# Altium PCB PCB_2.PcbDoc
Units mm, origin at the board's own origin, x right, y up, seen from the top; angles counter-clockwise.
Board outline 97.5 x 97.5 mm, 2 copper layers (Top Layer, Bottom Layer); 59 components, 71 nets, 255 pads, 322 vias.
Unrouted connection lines stored in the file: 1.
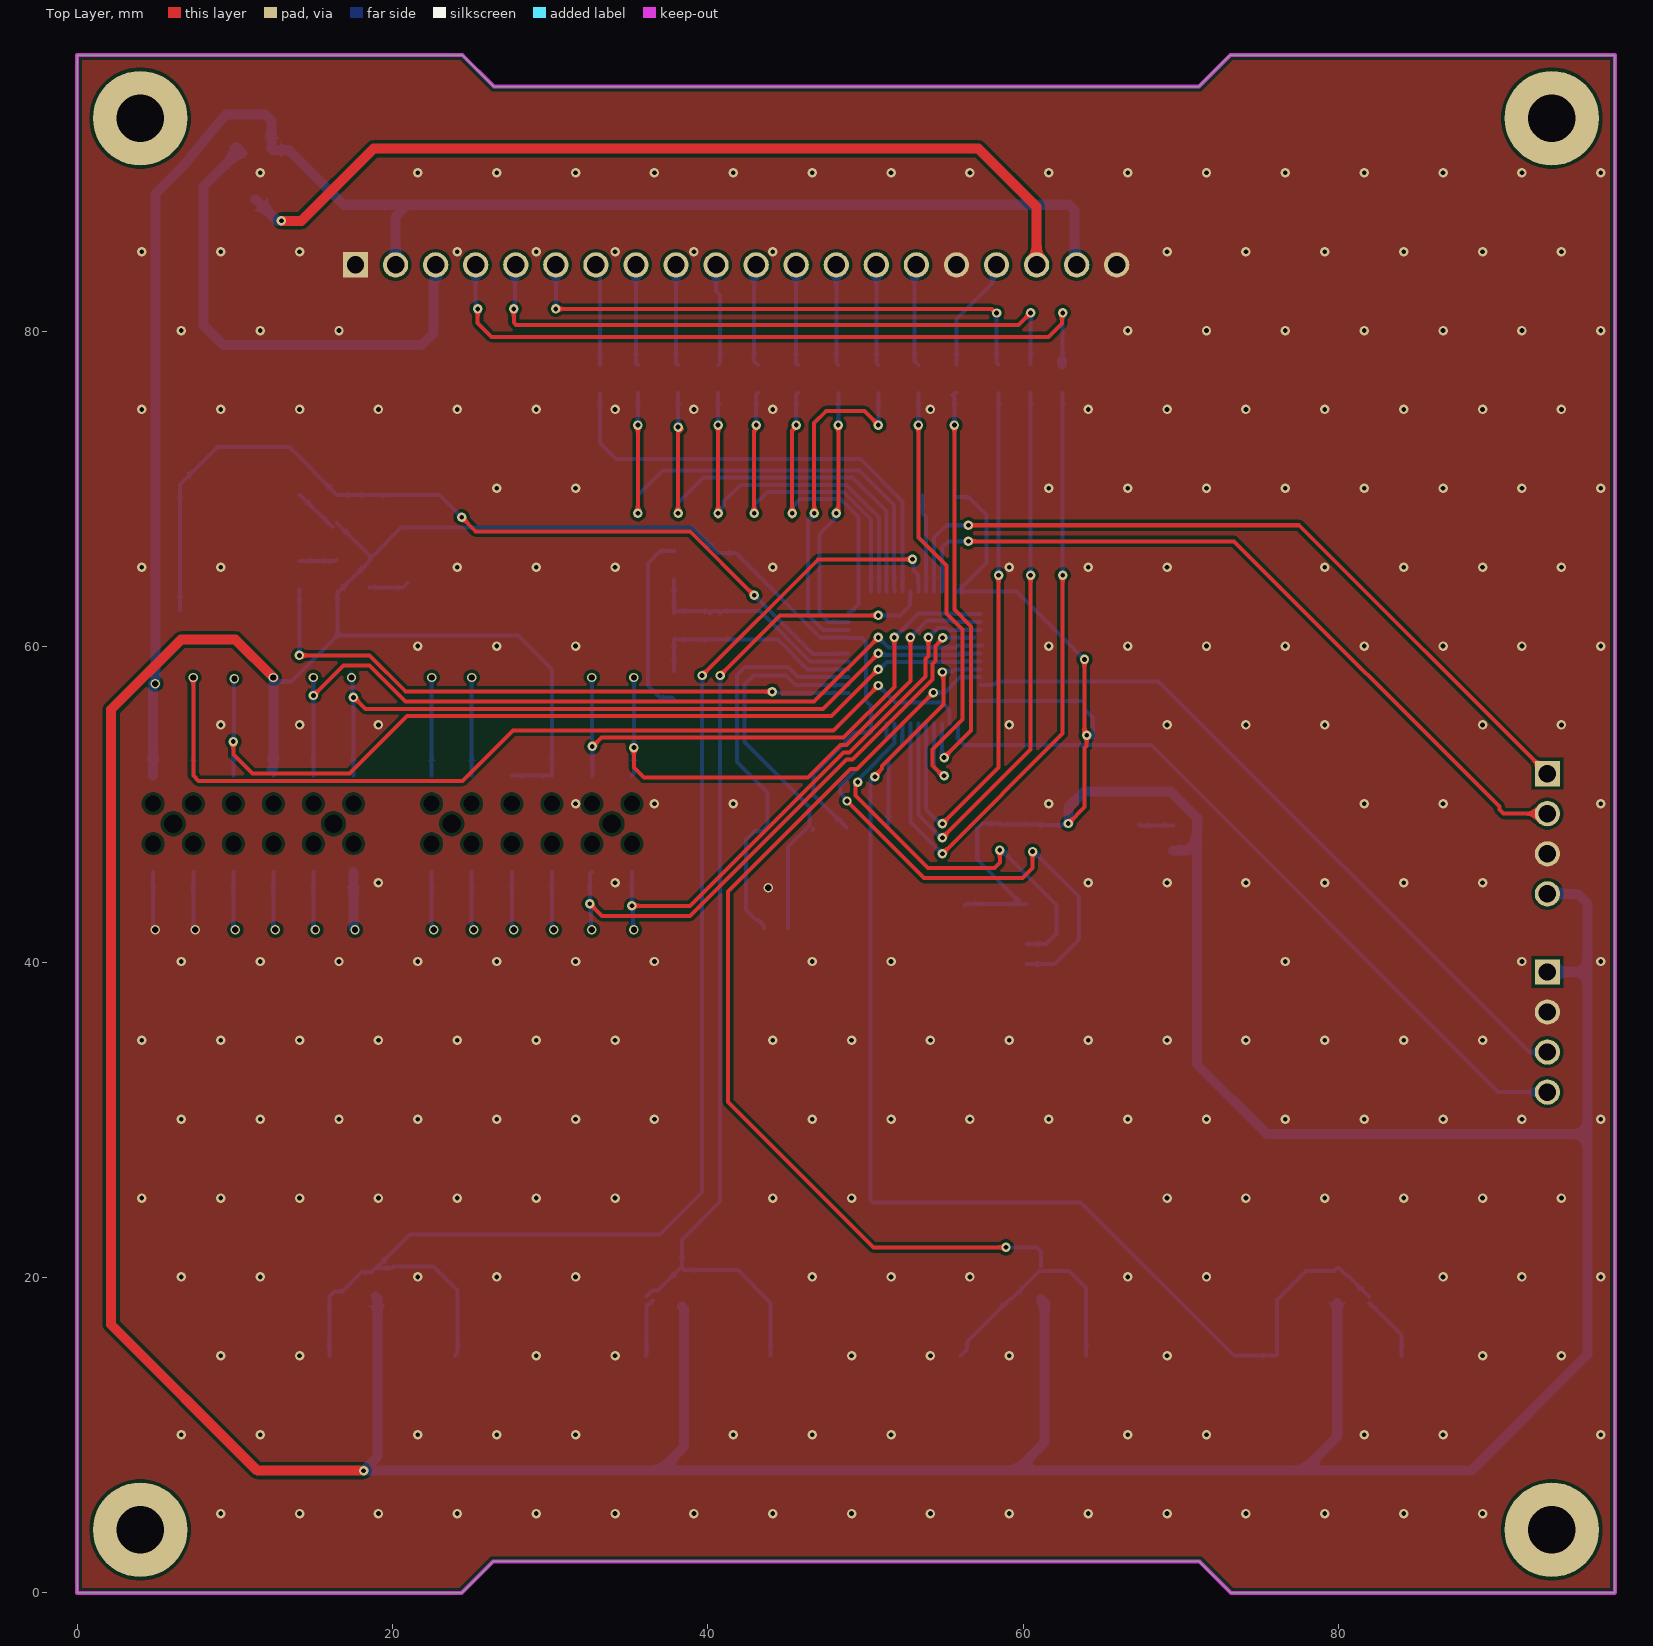
[diagram p0: Top Layer view]
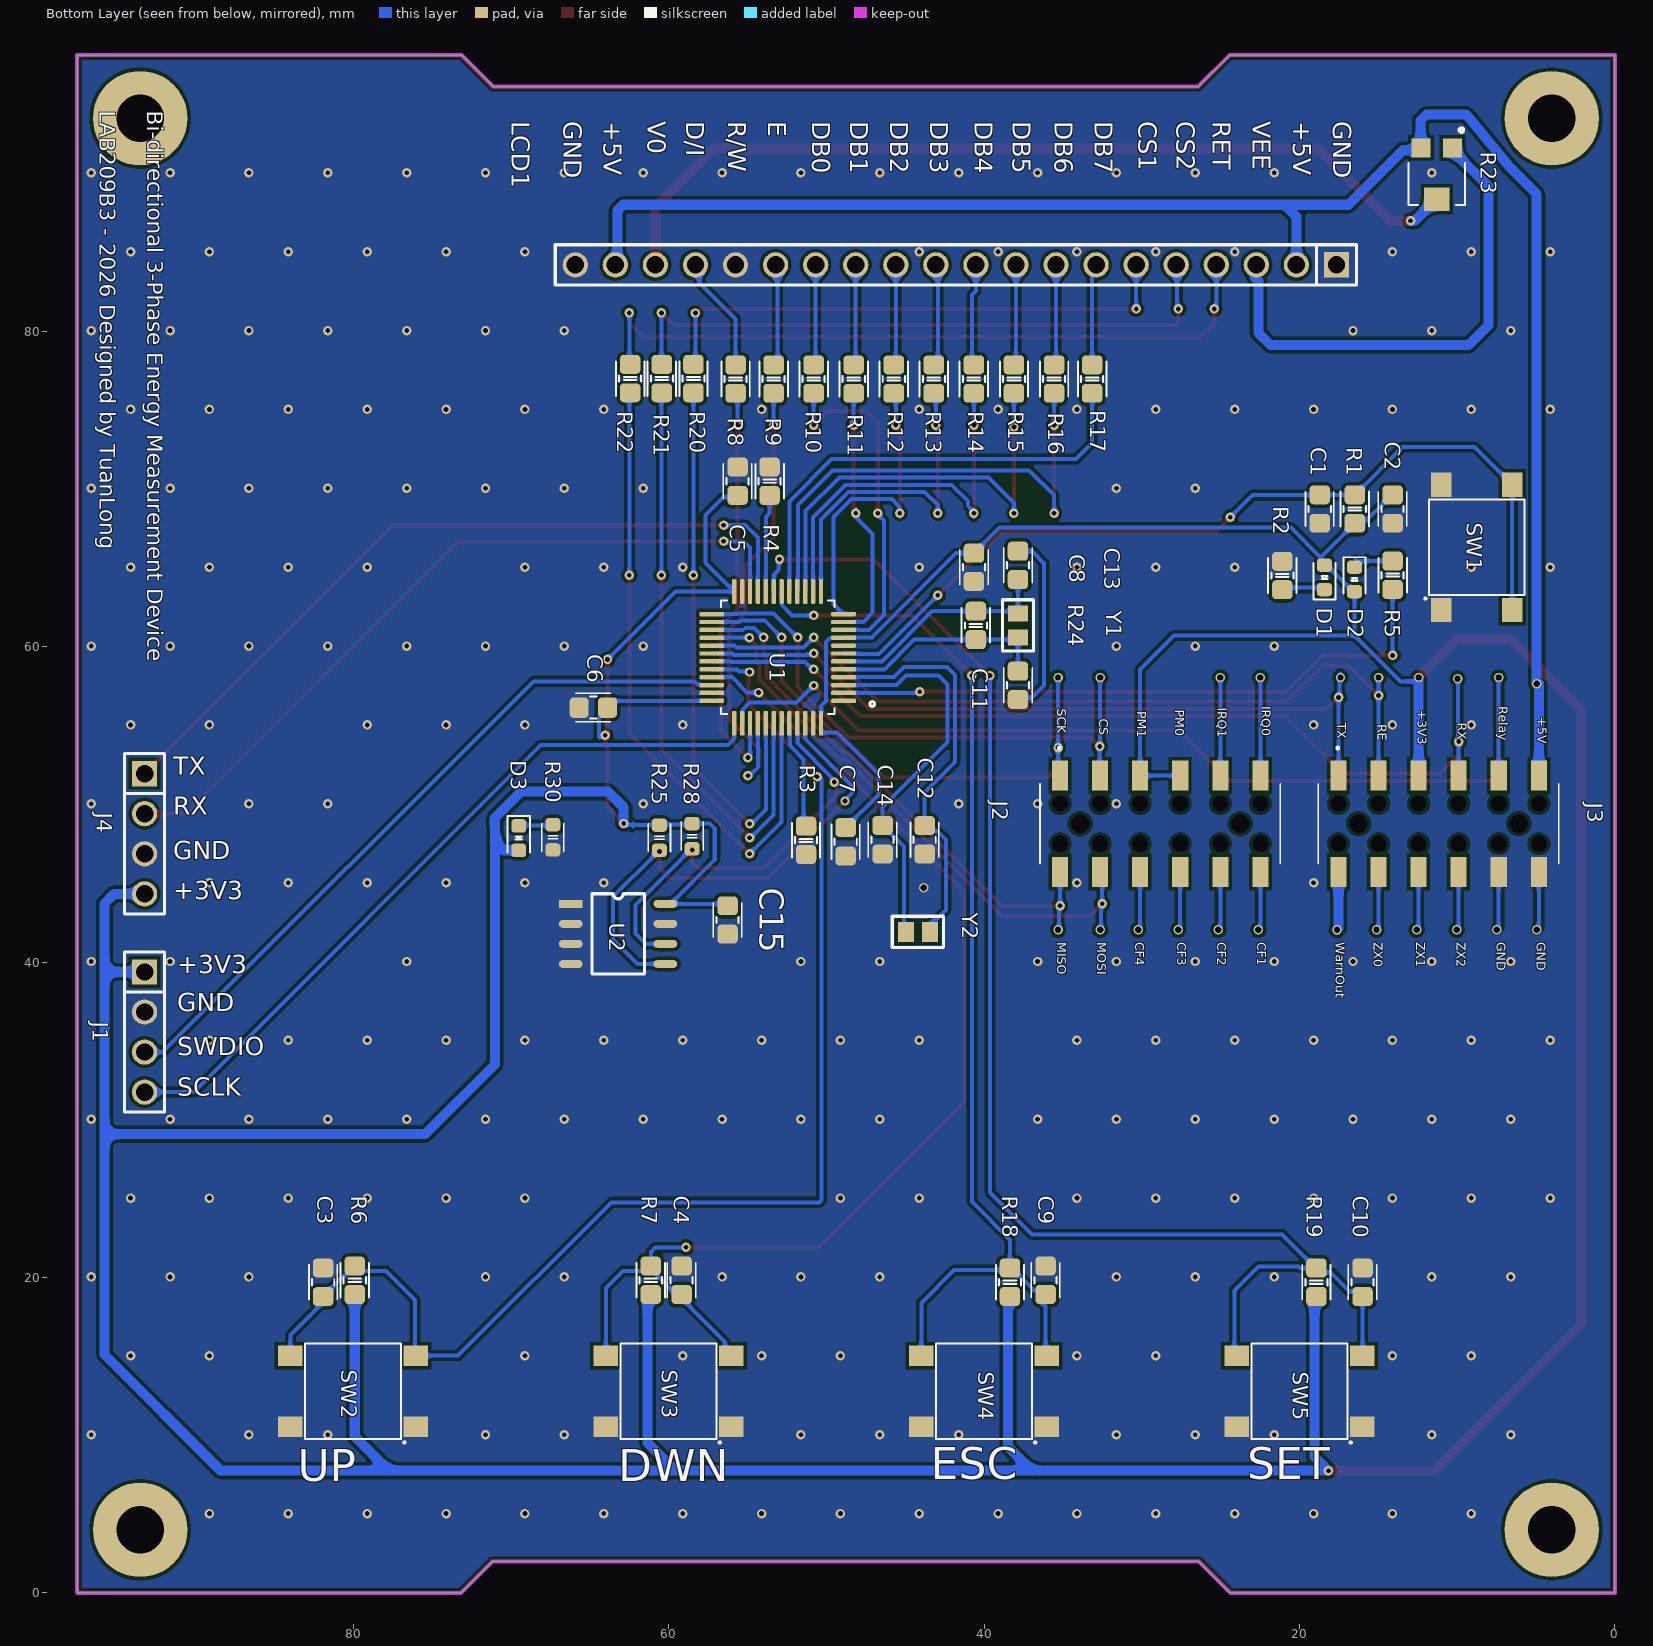
[diagram p1: Bottom Layer view, seen from below]
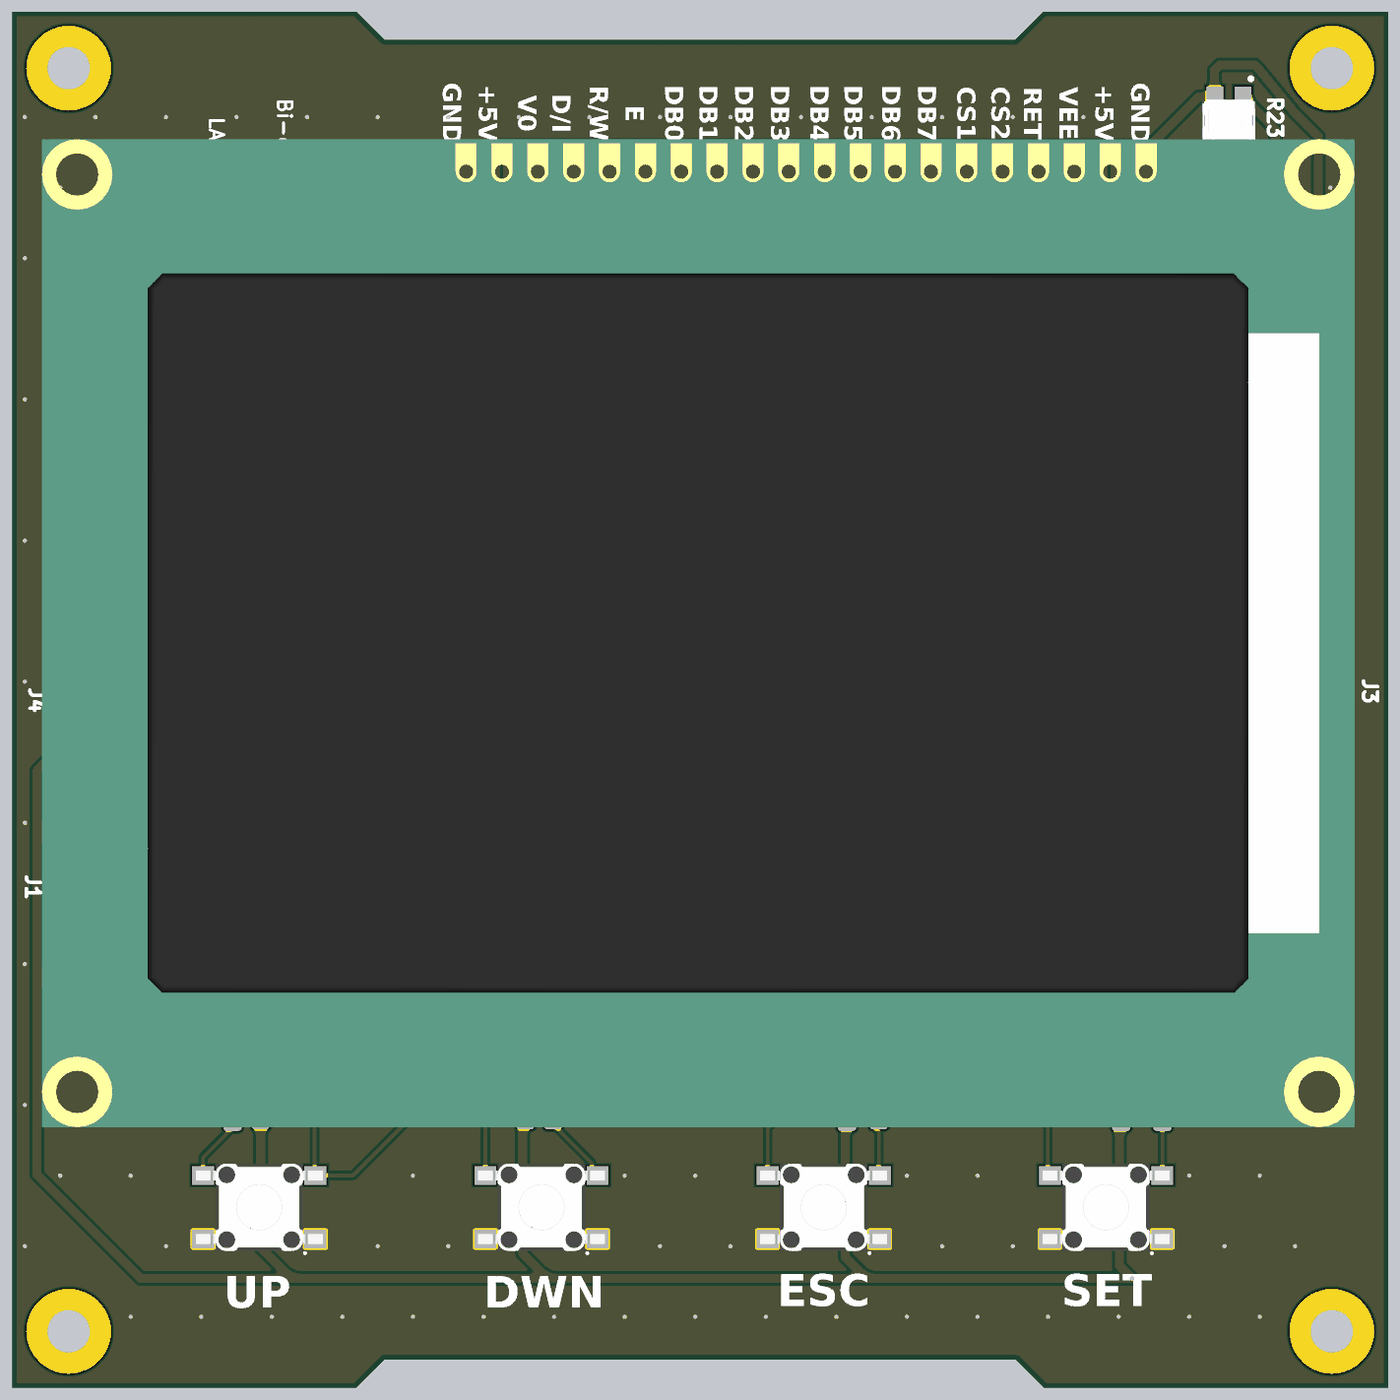
[diagram p2: 3D render of the assembled board from below, using the file's embedded part models]

## Layer stack, top to bottom
Top Solder: solder mask 0.0102, Solder Resist, Dk 3.5
Top Layer: signal copper 0.0356
Dielectric 1: dielectric 0.32, FR-4, Dk 4.8
Bottom Layer: signal copper 0.0356
Bottom Solder: solder mask 0.0102, Solder Resist, Dk 3.5

## Board outline
0,0 0,97.5 24.42,97.5 26.42,95.5 71.116,95.5 73.116,97.5 97.5,97.5 97.5,0.036 97.464,0 73.152,0 71.152,2 26.384,2 24.384,0

## Design rules (kind name [scope] priority, off if disabled: settings)
Clearance [All] p1: gap=0.203 ignorepadtopadclearanceinfootprint=TRUE
PlaneClearance [All] p1: clearance=0.254
PlaneConnect [All] p1: planeconnectstyle=Direct reliefexpansion=0.508 reliefentries=4 reliefconductorwidth=0.254 reliefairgap=0.254
PolygonConnect [All] p1: connectstyle=Direct reliefconductorwidth=0.254 reliefentries=4 polygonreliefangle="90 Angle" airgapwidth=0.254
RoutingVias [All] p1: holewidth=0.3 width=0.6 viastyle="Through Hole" minholewidth=0.3 minwidth=0.6 maxholewidth=0.711 maxwidth=1.2
SolderMaskExpansion [All] p1: expansion=0.102 istentingtop=FALSE
SupplyNets "Schematic Supply Nets_2" [InNet('VCC5V')] p1: voltage=0.000
SupplyNets "Schematic Supply Nets_1" [InNet('GND')] p2: voltage=0.000
SupplyNets "Schematic Supply Nets" [InNet('VCC3V3')] p3: voltage=0.000
Width [All] p1: maxlimit=0.635 minlimit=0.152 preferedwidth=0.254
28 further rules are at their usual default settings.

## Classes and differential pairs
component class Sheet1: C1 C2 C4 C5 C7 C8 C9 C10 C15 D1 D2 D3 J1 J2 J3 J4 LCD1 R1 R2 R3 R4 R5 R8 R9 R12 R14 R15 R16 R17 R18 R19 R21 R22 R25 SW1 SW2 SW3 SW4 SW5 U1 U2 UP Y1 Y2

## Components (designator, comment, footprint, x,y, rotation, side; value= is the part's Value field where it differs from the comment)
C1 "100nF" CAP_C_2012X110 18.715,68.718 r90 bottom
C2 "100nF" CAP_C_2012X110 14.097,68.718 r90 bottom
C3 "100nF" CAP_C_2012X110 81.896,19.696 r270 bottom
C4 "100nF" CAP_C_2012X110 59.173,19.823 r270 bottom
C5 "100nF" CAP_C_2012X110 55.626,70.485 r270 bottom
C6 "100nF" CAP_C_2012X110 64.77,56.134 r180 bottom
C7 "100nF" CAP_C_2012X110 48.768,47.625 r90 bottom
C8 "100nF" CAP_C_2012X110 40.64,65.024 r90 bottom
C9 "100nF" CAP_C_2012X110 36.098,19.823 r270 bottom
C10 "100nF" CAP_C_2012X110 16.002,19.696 r270 bottom
C11 "100nF" CAP_C_2012X110 37.846,57.542 r90 bottom
C12 "100nF" CAP_C_2012X110 43.759,47.752 r90 bottom
C13 "100nF" CAP_C_2012X110 37.846,65.151 r270 bottom
C14 "100nF" CAP_C_2012X110 46.426,47.752 r90 bottom
C15 "100nF" CAP_C_2012X110 56.261,42.668 r90 bottom
D1 "_LED_RED" LED_0603 18.415,64.389 r90 bottom
D2 "_LED_BLUE" LED_0603 16.51,64.262 r270 bottom
D3 "_LED_RED" LED_0603 69.498,47.855 r270 bottom
J1 "HEADER 4x1" Header_254P_4x1 93.218,35.56 r270 bottom
J2 "SSM-106-S-DV" SSM-106-XXX-DV-BE 28.829,48.768 r0 bottom
J3 "SSM-106-S-DV" SSM-106-XXX-DV-BE 11.176,48.768 r0 bottom
J4 "HEADER 4x1" Header_254P_4x1 93.218,48.133 r270 bottom
LCD1 "DISPLAY_LCDGRAP" LCD_GRAP_20PIN 48.895,53.467 r270 bottom locked
R1 "1k" RES_C_2012X65 16.494,68.718 r270 bottom
R2 "1k" RES_C_2012X65 21.082,64.505 r90 bottom
R3 "1k" RES_C_2012X65 51.285,47.713 r270 bottom
R4 "1k" RES_C_2012X65 53.594,70.485 r90 bottom
R5 "1k" RES_C_2012X65 14.097,64.527 r270 bottom
R6 "1k" RES_C_2012X65 79.896,19.823 r270 bottom
R7 "1k" RES_C_2012X65 61.128,19.823 r270 bottom
R8 "1k" RES_C_2012X65 55.753,76.962 r270 bottom
R9 "1k" RES_C_2012X65 53.34,76.962 r270 bottom
R10 "1k" RES_C_2012X65 50.8,76.962 r270 bottom
R11 "1k" RES_C_2012X65 48.26,76.962 r270 bottom
R12 "1k" RES_C_2012X65 45.72,76.962 r270 bottom
R13 "1k" RES_C_2012X65 43.18,76.962 r270 bottom
R14 "1k" RES_C_2012X65 40.64,76.962 r270 bottom
R15 "1k" RES_C_2012X65 38.1,76.962 r270 bottom
R16 "1k" RES_C_2012X65 35.56,76.962 r270 bottom
R17 "1k" RES_C_2012X65 33.147,76.962 r270 bottom
R18 "1k" RES_C_2012X65 38.354,19.696 r270 bottom
R19 "1k" RES_C_2012X65 18.923,19.696 r270 bottom
R20 "1k" RES_C_2012X65 58.42,76.989 r270 bottom
R21 "1k" RES_C_2012X65 60.428,76.989 r270 bottom
R22 "1k" RES_C_2012X65 62.436,76.989 r270 bottom
R23 "20K" TRIM_TC33X-2-103E 11.29,89.8 r270 bottom
R24 "1k" RES_C_2012X65 40.513,61.341 r270 bottom
R25 "4.7k" RES_C_1608X60 60.579,47.879 r90 bottom
R28 "4.7k" RES_C_1608X60 58.503,47.975 r90 bottom
R30 "330Ohms" RES_C_1608X60 67.339,47.906 r270 bottom
SW1 "SW2" SW2-SMD 8.763,66.294 r90 bottom value="SW chip 2 pin"
SW2 "SW2" SW2-SMD 80,12.791 r0 bottom value="SW chip 2 pin"
SW3 "SW2" SW2-SMD 60,12.791 r0 bottom value="SW chip 2 pin"
SW4 "SW2" SW2-SMD 40,12.791 r0 bottom value="SW chip 2 pin"
SW5 "SW2" SW2-SMD 20,12.791 r0 bottom value="SW chip 2 pin"
U1 "STM32F103C8T6" QFP50P900X900X160-48N 53.086,59.309 r0 bottom
U2 "CAT24C32WI-GT3 IC EEPROM 32Kbit 8-SOIC" SOP8 66.698,43.688 r180 bottom
Y1 "Crystal 2 Pins" CRYSTAL_NX2012SA 37.846,61.341 r270 bottom value=32.768kHz
Y2 "Crystal 2 Pins" CRYSTAL_NX2012SA 44.196,41.91 r180 bottom value=32.768kHz

## Footprints (in the part's own frame and the unit in brackets; to place one, negate y for a bottom-side part, rotate by r counter-clockwise, add the part's x,y. Pads: shape width x height; smd on the part's side, far side on the other; paste and mask are expansions set on the pad)
CAP_C_2012X110 [mm] "Chip Capacitor, 2-Leads, Body 2.00x1.25mm, IPC High Density"
  rrect41% 1.2x1.3 smd: 1(-0.9,0) 2(0.9,0)
  silkscreen extent -1.1,-0.9 1.1,0.9, body extent -1.1,-0.72 1.1,0.72, height 1.1
CRYSTAL_NX2012SA [mil] "Crystal NDK NX2012SA"
  rect 40x50 smd paste-1: 1(-30,0) 2(30,0)
  silkscreen extent -64,-39 64,39, body extent -40,-20 40,20, height 21
Header_254P_4x1 [mm]
  rect 1.6x1.6 hole 1.1: 1(-3.81,0)
  round 1.6 hole 1.1: 2(-1.27,0) 3(1.27,0) 4(3.81,0)
  silkscreen extent -5.08,-1.27 5.08,1.27
LCD_GRAP_20PIN [mm]
  rect 1.6x1.6 hole 1.1: 1(-30.734,31.242)
  round 1.6 hole 1.1: 2(-30.734,28.702) 3(-30.734,26.162) 4(-30.734,23.622) 5(-30.734,21.082) 6(-30.734,18.542) 7(-30.734,16.002) 8(-30.734,13.462) 9(-30.734,10.922) 10(-30.734,8.382) 11(-30.734,5.842) 12(-30.734,3.302) 13(-30.734,0.762) 14(-30.734,-1.778) 15(-30.734,-4.318) 16(-30.734,-6.858) 17(-30.734,-9.398) 18(-30.734,-11.938) 19(-30.734,-14.478) 20(-30.734,-17.018)
  silkscreen extent -32,-18.29 -29.46,32.51, body extent -35,-46.5 35,46.5, height 21.2
LED_0603 [mm]
  rrect50% 0.85x0.95 smd: 1(-0.775,0) 2(0.775,0)
  silkscreen extent -1.4,-0.7 0.9,0.7, body extent -0.8,-0.4 0.8,0.4, height 0.7
QFP50P900X900X160-48N [mm]
  rrect50% 1.56x0.28 smd: 1(-4.18,2.75) 2(-4.18,2.25) 3(-4.18,1.75) 4(-4.18,1.25) 5(-4.18,0.75) 6(-4.18,0.25) 7(-4.18,-0.25) 8(-4.18,-0.75) 9(-4.18,-1.25) 10(-4.18,-1.75) 11(-4.18,-2.25) 12(-4.18,-2.75) 25(4.18,-2.75) 26(4.18,-2.25) 27(4.18,-1.75) 28(4.18,-1.25) 29(4.18,-0.75) 30(4.18,-0.25) 31(4.18,0.25) 32(4.18,0.75) 33(4.18,1.25) 34(4.18,1.75) 35(4.18,2.25) 36(4.18,2.75)
  rrect50% 0.28x1.56 smd: 13(-2.75,-4.18) 14(-2.25,-4.18) 15(-1.75,-4.18) 16(-1.25,-4.18) 17(-0.75,-4.18) 18(-0.25,-4.18) 19(0.25,-4.18) 20(0.75,-4.18) 21(1.25,-4.18) 22(1.75,-4.18) 23(2.25,-4.18) 24(2.75,-4.18) 37(2.75,4.18) 38(2.25,4.18) 39(1.75,4.18) 40(1.25,4.18) 41(0.75,4.18) 42(0.25,4.18) 43(-0.25,4.18) 44(-0.75,4.18) 45(-1.25,4.18) 46(-1.75,4.18) 47(-2.25,4.18) 48(-2.75,4.18)
  silkscreen extent -6.15,-3.6 3.6,3.6, body extent -4.5,-4.5 4.5,4.5, height 1.6
RES_C_1608X60 [mm] "Chip Resistor, 2-Leads, Body 1.63x0.83mm, IPC High Density"
  rrect50% 0.85x0.95 smd: 1(-0.8,0) 2(0.8,0)
  silkscreen extent -0.9,-0.7 0.9,0.7, body extent -0.87,-0.48 0.87,0.48, height 0.6
RES_C_2012X65 [mm] "Chip Resistor, 2-Leads, Body 2.00x1.25mm, IPC High Density"
  rrect41% 1.2x1.3 smd: 1(-0.9,0) 2(0.9,0)
  silkscreen extent -1.1,-0.9 1.1,0.9, body extent -1.07,-0.7 1.07,0.7, height 0.65
SOP8 [mm]
  rect 1.5x0.5 smd: 1(0.5,0)
  oval 1.5x0.5 smd: 2(0.5,-1.27) 3(0.5,-2.54) 4(0.5,-3.81) 5(6.5,-3.81) 6(6.5,-2.54) 7(6.5,-1.27) 8(6.5,0)
  silkscreen extent 1.84,-4.45 5.17,0.63, body extent 0.43,-4.36 6.43,0.55, height 1.75
SSM-106-XXX-DV-BE [mm]
  rect 1.02x1.905 smd: 1(6.35,-3.047) 2(6.35,3.047) 3(3.81,-3.047) 4(3.81,3.047) 5(1.27,-3.047) 6(1.27,3.047) 7(-1.27,-3.047) 8(-1.27,3.047) 9(-3.81,-3.047) 10(-3.81,3.047) 11(-6.35,-3.047) 12(-6.35,3.047)
  round 0.585 hole 1.17 unplated: 13(5.08,0) 14(-5.08,0)
  round 0.51 hole 1.02 unplated: 13(6.35,-1.27) 14(6.35,1.27) 15(3.81,-1.27) 16(3.81,1.27) 17(1.27,-1.27) 18(1.27,1.27) 19(-1.27,-1.27) 20(-1.27,1.27) 21(-3.81,-1.27) 22(-3.81,1.27) 23(-6.35,-1.27) 24(-6.35,1.27)
  silkscreen extent -7.62,-4.85 7.62,2.54, body extent -7.62,-3.52 7.62,3.52, height 7.5
SW2-SMD [mm] "6*6mm vertical type, SMD, height 5.0mm, black actuator, 160gf, T&R"
  rect 1.55x1.3 smd: 1(-3.975,2.25) 1(3.975,2.25) 2(-3.975,-2.25) 2(3.975,-2.25)
  silkscreen extent -3.29,-3.04 3.04,3.29, body extent -4.5,-3.1 4.5,3.1, height 4.99
TRIM_TC33X-2-103E [mm]
  rect 1.2x1.2 smd: 1(-1.8,1) 3(-1.8,-1)
  rect 1.5x1.6 smd: 2(1.45,0)
  silkscreen extent -3.07,-1.8 1.8,1.8, body extent -1.5,-1.9 1.5,1.9, height 1.1

## Part data
C1 C2 C3 C4 C5 C6 C7 C8 C9 C10 C11 C12 C13 C14 C15: library part _CAP_C_2, "CAP"
J1 J4: library part "Header 4x1"
J2 J3: "Connector", Arrow Part Number=SSM-105-S-DV, Manufacturer_Name=SAMTEC, Mouser Part Number=200-SSM105SDV, Arrow Price/Stock=https://www.arrow.com/en/products/ssm-105-s-dv/samtec, Datasheet Link=https://mm.digikey.com/Volume0/opasdata/d220001/medias/docus/6129/ssm-1xx-xxx-dv-xx-xx-xxx-x-xx-mkt.pdf, Manufacturer_Part_Number=SSM-105-S-DV, Mouser Price/Stock=https://www.mouser.co.uk/ProductDetail/Samtec/SSM-105-S-DV?qs=XtX6y9BSeMiNY1vJI%2FFCQQ%3D%3D
LCD1: "Display 128x64pixel", Manufacturer="Newhaven Display", Manufacturer Part Number=NHD-12864AZ-NSW-BBW-TR, Supplier Part Number=NHD-12864AZ-NSW-BBW-TR-ND, Category="LCD, OLED, Graphic Displays", ComponentLink1Description=https://datasheet.ciiva.com:443/pdfs/VipMasterIC/IC/NWAL/NWALS00082/NWALS00082-1.pdf?src-supplier=IHS+Markit, ComponentLink1URL=https://datasheet.ciiva.com:443/pdfs/VipMasterIC/IC/NWAL/NWALS00082/NWALS00082-1.pdf?src-supplier=IHS+Markit, ComponentLink2Description=https://datasheet.ciiva.com/2102/nhd-12864az-nsw-bbw-tr-2102907.pdf?src-supplier=Digikey, ComponentLink2URL=https://datasheet.ciiva.com/2102/nhd-12864az-nsw-bbw-tr-2102907.pdf?src-supplier=Digikey, ComponentLink3Description=https://datasheet.ciiva.com/16231/nhd-12864az-nsw-bbw-tr-16231892.pdf?src-supplier=Onlinecomponents.com, ComponentLink3URL=https://datasheet.ciiva.com/16231/nhd-12864az-nsw-bbw-tr-16231892.pdf?src-supplier=Onlinecomponents.com, ComponentLink4Description=https://datasheet.ciiva.com/5326/nhd-12864az-nsw-bbw-tr-52487-5326437.pdf?src-supplier=Mouser, ComponentLink4URL=https://datasheet.ciiva.com/5326/nhd-12864az-nsw-bbw-tr-52487-5326437.pdf?src-supplier=Mouser, ComponentLink5Description=https://datasheet.ciiva.com/30204/nhd-12864az-nsw-bbw-tr-30204634.pdf?src-supplier=Onlinecomponents.com, ComponentLink5URL=https://datasheet.ciiva.com/30204/nhd-12864az-nsw-bbw-tr-30204634.pdf?src-supplier=Onlinecomponents.com, Pricing="1=31,34, 5=29,46, 10=27,579, 50=26,0124, 100=24,7588, 250=23,50516 (USD)", RoHS=No, Stock=303, Supplier=Digikey
R1 R2 R3 R4 R5 R6 R7 R8 R9 R10 R11 R12 R13 R14 R15 R16 R17 R18 R19 R20 R21 R22 R24: library part _RES_B_2, "RES"
R23: library part TC33X-2-103E, "10 kOhms 0.1W, 1/10W J Lead Surface Mount Trimmer Potentiometer Cermet 1 Turn Top Adjustment", Package="SOD-23 Bourns", Check_prices=https://www.snapeda.com/parts/TC33X-2-103E/Bourns/view-part/47092/?ref=eda, Digi-Key_Part_Number=TC33X-103ECT-ND, MF=Bourns, MP=TC33X-2-103E, Purchase-URL=https://pricing.snapeda.com/search/part/TC33X-2-103E/?ref=eda, SnapEDA_Link=https://www.snapeda.com/parts/TC33X-2-103E/Bourns/view-part/47092/?ref=snap
R25 R28 R30: library part _RES_B_2_1, "RES"
SW1 SW2 SW3 SW4 SW5: "Switch button 2 pin"
U1: "ARM® Cortex®-M3 STM32F1 Microcontroller IC 32-Bit 72MHz 64KB (64K x 8) FLASH 48-LQFP (7x7)", Package="LQFP-48 STMicroelectronics", Check_prices=https://www.snapeda.com/parts/STM32F103C8T6/STMicroelectronics/view-part/?ref=eda, MF=STMicroelectronics, MP=STM32F103C8T6, SnapEDA_Link=https://www.snapeda.com/parts/STM32F103C8T6/STMicroelectronics/view-part/?ref=snap
Y1 Y2: library part OSC_32.768kHz, "Crystal", Load Capacitance=12.5pF, Manufacturer 1=NDK, Manufacturer Part Number 1=NX2012SA-32.768K-STD-MUB-1, Supplier Part Number 1=644-1219-1-ND, Tolerance=±20ppm, Category=Crystal/Oscillator, ComponentLink1Description="SVN Datasheet", ComponentLink1URL=https://chn-vm-apps.microchip.com/mchprepo/parts/Datasheets/c_NX2012SA-STD-MUB-1_e.pdf, ComponentLink2Description="Local Datasheet", ComponentLink2URL=C:\ALTIUM_WORK\00001_MCHP-CDB\Datasheets\c_NX2012SA-STD-MUB-1_e.pdf, ComponentLink3Description="Open Symbol", ComponentLink3URL="C:\ALTIUM_WORK\00001_MCHP-CDB\Library\LibraryRefs\Crystal 2 Pins.SchLib", ComponentLink4Description="Open Footprint", ComponentLink4URL=C:\ALTIUM_WORK\00001_MCHP-CDB\Library\Footprints\CRYSTAL_NX2012SA.PcbLib, ComponentLink5Description="Open Footprint 2", ComponentLink6Description="Open Footprint 3", ComponentLink7Description="Open Footprint 4", Description_="CRYSTAL 32.768kHz 12.5pF SMD NX2012SA", Dev Tools Status=Production, MCHP-ID=OSC1092, Owner="Jamus Griego", Populated=YES, Quantity Override=1, Revision=1, Status="MCL Design", Supplier 1=Digi-Key, Symbol="Crystal 2 Pins", TYPE=Crystal

## Free pads (board coordinates)
  round 6 hole 3: 1(4,93.5) 2(4,4) 3(93.5,4) 4(93.5,93.5)

## Via types
v1: diameter 0.6, hole 0.3, Top Layer to Bottom Layer, tented both sides, 299 vias
v2: diameter 0.6, hole 0.4, Top Layer to Bottom Layer, 21 vias
v3: diameter 0.6, hole 0.4, Top Layer to Bottom Layer, tented both sides, 2 vias

## Nets (pads, with @x,y where several pads share a name; then routed paths per layer and width w, separated by ;. In a path a pad name is that pad's centre, name@x,y a point inside that pad or via, vN(x,y) a via of type N, cw(c..) or ccw(c..) an arc to the next point about the centre after c; other vN are vias at no path point)
BOOT0: R3.1 U1.44 | length 7
  Bottom Layer w0.254: R3.1 51.439,48.767 51.439,52.848 52.306,53.715 52.306,54.4 52.323,54.417 52.323,55.116 U1.44
BOOT1: R4.1 U1.20 | length 6.2
  Bottom Layer w0.254: R4.1 53.594,68.453 53.836,68.211 U1.20
CF1: J2.12 | length 3.7
  Bottom Layer w0.254: J2.12 22.479,42.258 22.606,42.131 v2(22.606,42.037)
CF2: J2.10 | length 3.7
  Bottom Layer w0.254: J2.10 25.019,42.258 25.146,42.131 v2(25.146,42.037)
CF3: J2.8 | length 3.7
  Bottom Layer w0.254: J2.8 27.559,42.258 27.686,42.131 v2(27.686,42.037)
CF4: J2.6 | length 3.7
  Bottom Layer w0.254: J2.6 30.099,42.258 30.226,42.131 v2(30.226,42.037)
CS1: R20.2 U1.41 | length 35.6
  Top Layer w0.254: v1(54.864,48.77) 58.42,52.326 v1(58.42,64.516)
  Bottom Layer w0.254: U1.41 53.827,55.12 53.827,49.662 54.653,48.836 54.704,48.836 v1@54.804,48.737 ; v1(58.42,64.516) R20.2
CS2: R21.2 U1.42 | length 38.5
  Top Layer w0.254: v1(54.864,47.879) 60.452,53.467 v1(60.452,64.516)
  Bottom Layer w0.254: U1.42 53.336,49.313 54.414,48.235 v1@54.85,47.799 ; R21.2 60.452,76.065 v1(60.452,64.516)
D_I: R8.2 U1.39 | length 26.7
  Top Layer w0.254: v1(54.966,52.959) 56.686,54.679 56.686,61.28 55.626,62.34 v1@55.626,73.914
  Bottom Layer w0.254: U1.39 54.836,53.183 54.966,53.053 v1(54.966,52.959) ; v1@55.626,73.914 55.626,75.819 55.499,75.946 55.615,76.062 R8.2
  other v1: 55.626,74.041
E: R9.2 U1.40 | length 30
  Top Layer w0.254: v1(53.34,74.041) 53.34,66.929 55.118,65.151 55.118,62.103 56.124,61.097 56.124,55.362 54.234,53.472 54.234,52.446 v1@54.864,51.816
  Bottom Layer w0.254: v1(53.34,74.041) R9.2 ; U1.40 54.336,52.344 v1@54.864,51.816
  other v1: 54.966,51.816
GND: C1.1 C2.1 C3.1 C4.1 C5.1 C6.1 C7.1 C8.1 C9.1 C10.1 C12.1 C14.1 C15.1 J1.2 J3.10 J3.12 J4.3 LCD1.1 LCD1.16 LCD1.20 R2.2 R3.2 R4.2 R30.2 SW1.1 SW2.1 SW3.1 SW4.1 SW5.1 U1.8 U1.23 U1.35 U1.47 U2.1 U2.2 U2.3 U2.4 U2.7 | length 7.5
  Bottom Layer w0.254: J3.12 4.826,42.258 4.953,42.131 v2(4.953,42.037) ; J3.10 7.366,42.258 7.493,42.131 v2(7.493,42.037)
  other v1: 9.106,5.032 14.106,5.032 19.106,5.032 24.106,5.032 29.106,5.032 34.106,5.032 39.106,5.032 44.106,5.032 49.106,5.032 54.106,5.032 59.106,5.032 64.106,5.032 69.106,5.032 74.106,5.032 79.106,5.032 84.106,5.032 89.106,5.032 6.606,10.032 11.606,10.032 21.606,10.032 26.606,10.032 31.606,10.032 41.606,10.032 46.606,10.032 51.606,10.032 66.606,10.032 71.606,10.032 81.606,10.032 86.606,10.032 96.606,10.032 9.106,15.032 14.106,15.032 29.106,15.032 34.106,15.032 49.106,15.032 54.106,15.032 59.106,15.032 69.106,15.032 89.106,15.032 94.106,15.032 6.606,20.032 11.606,20.032 21.606,20.032 26.606,20.032 31.606,20.032 46.606,20.032 51.606,20.032 56.606,20.032 66.606,20.032 71.606,20.032 86.606,20.032 91.606,20.032 96.606,20.032 4.106,25.032 9.106,25.032 14.106,25.032 19.106,25.032 24.106,25.032 29.106,25.032 34.106,25.032 44.106,25.032 49.106,25.032 69.106,25.032 74.106,25.032 79.106,25.032 84.106,25.032 89.106,25.032 94.106,25.032 6.606,30.032 11.606,30.032 16.606,30.032 21.606,30.032 26.606,30.032 31.606,30.032 36.606,30.032 46.606,30.032 51.606,30.032 56.606,30.032 61.606,30.032 66.606,30.032 71.606,30.032 76.606,30.032 81.606,30.032 86.606,30.032 91.606,30.032 96.606,30.032 4.106,35.032 9.106,35.032 14.106,35.032 19.106,35.032 24.106,35.032 29.106,35.032 34.106,35.032 44.106,35.032 49.106,35.032 54.106,35.032 59.106,35.032 64.106,35.032 69.106,35.032 74.106,35.032 79.106,35.032 84.106,35.032 89.106,35.032 6.606,40.032 11.606,40.032 16.606,40.032 21.606,40.032 26.606,40.032 31.606,40.032 36.606,40.032 46.606,40.032 51.606,40.032 76.606,40.032 91.606,40.032 96.606,40.032 19.106,45.032 34.106,45.032 64.106,45.032 69.106,45.032 74.106,45.032 79.106,45.032 84.106,45.032 89.106,45.032 31.606,50.032 36.606,50.032 41.606,50.032 61.606,50.032 81.606,50.032 86.606,50.032 96.606,50.032 9.106,55.032 14.106,55.032 19.106,55.032 59.106,55.032 69.106,55.032 74.106,55.032 79.106,55.032 89.106,55.032 94.106,55.032 21.606,60.032 26.606,60.032 31.606,60.032 61.606,60.032 66.606,60.032 71.606,60.032 76.606,60.032 81.606,60.032 86.606,60.032 91.606,60.032 96.606,60.032 4.106,65.032 9.106,65.032 24.106,65.032 29.106,65.032 34.106,65.032 44.106,65.032 59.106,65.032 64.106,65.032 69.106,65.032 79.106,65.032 84.106,65.032 89.106,65.032 94.106,65.032 26.606,70.032 31.606,70.032 61.606,70.032 66.606,70.032 71.606,70.032 76.606,70.032 81.606,70.032 86.606,70.032 91.606,70.032 96.606,70.032 4.106,75.032 9.106,75.032 14.106,75.032 19.106,75.032 24.106,75.032 29.106,75.032 34.106,75.032 39.106,75.032 44.106,75.032 54.106,75.032 64.106,75.032 69.106,75.032 74.106,75.032 79.106,75.032 84.106,75.032 89.106,75.032 94.106,75.032 6.606,80.032 11.606,80.032 16.606,80.032 66.606,80.032 71.606,80.032 76.606,80.032 81.606,80.032 86.606,80.032 91.606,80.032 96.606,80.032 4.106,85.032 9.106,85.032 14.106,85.032 24.106,85.032 29.106,85.032 34.106,85.032 39.106,85.032 44.106,85.032 69.106,85.032 74.106,85.032 79.106,85.032 84.106,85.032 89.106,85.032 94.106,85.032 11.606,90.032 21.606,90.032 26.606,90.032 31.606,90.032 36.606,90.032 41.606,90.032 46.606,90.032 51.606,90.032 56.606,90.032 61.606,90.032 66.606,90.032 71.606,90.032 76.606,90.032 81.606,90.032 86.606,90.032 91.606,90.032 96.606,90.032
  other v3: 43.815,44.704
IRQ0: J2.11 | length 6.1
  Bottom Layer w0.254: J2.11 v2@22.479,57.912
  other v2: 22.479,58.039
IRQ1: J2.9 | length 6.1
  Bottom Layer w0.254: J2.9 v2@25.019,57.912
  other v2: 25.019,58.039
Key0: C3.2 R6.1 SW2.2 U1.32 | length 82.9
  Top Layer w0.254: v1(50.583,51.747) 50.583,51.803 51.036,52.257 51.036,52.437 54.924,56.324 54.924,58.326 v1(54.864,58.386)
  Bottom Layer w0.254: v1(50.583,51.747) 50.489,51.747 50.34,51.599 50.292,51.599 50.292,24.914 50.441,24.765 63.627,24.765 73.351,15.041 76.025,15.041 76.073,15.089 76.073,18.58 77.91,20.417 79.717,20.417 79.895,20.596 80.01,20.596 80.478,20.128 80.564,20.128 C3.2 ; v1(54.864,58.386) 54.91,58.432 55.545,58.432 55.672,58.559 U1.32 ; C3.2@81.945,18.367 83.975,16.338 SW2.2@83.975,15.041
Key1: C4.2 R7.1 SW3.2 U1.33 | length 74.8
  Top Layer w0.254: v1(54.294,57.085) 49.437,52.229 49.05,52.229 41.277,44.456 41.277,31.113 47.888,24.502 50.481,21.909 v1(58.893,21.909)
  Bottom Layer w0.254: v1(54.294,57.085) 55.013,57.085 55.987,58.059 U1.33 ; SW3.2@56.025,15.041 56.424,15.44 56.424,15.923 58.916,18.415 58.928,18.415 59.134,18.621 59.25,18.621 60.328,19.699 60.328,19.718 61.031,20.421 R7.1@61.078,20.421 ; v1(58.893,21.909) 58.909,21.894 60.844,21.894 61.128,21.61 R7.1 ; R7.1@61.128,20.421 62.891,20.421 63.975,19.337 SW3.2@63.975,15.041
Key2: C10.2 R19.1 SW5.2 U1.19 | length 91.6
  Top Layer w0.254: v1(39.624,58.166) 46.99,65.532 v1(52.966,65.532)
  Bottom Layer w0.254: SW5.2@16.025,15.041 16.002,15.064 16.002,18.596 C10.2 16.316,19.11 16.824,19.11 18.048,20.334 18.661,20.334 R19.1 ; SW5.2@23.975,15.041 24.13,15.196 24.13,19.177 22.606,20.701 20.066,20.701 19.961,20.596 R19.1 ; v1(39.624,58.166) 39.624,25.4 36.957,22.733 21.11,22.733 19.148,20.771 19.098,20.771 R19.1 ; v1(52.966,65.532) 53.018,65.48 53.018,64.851 53.306,64.563 53.306,64.028 53.323,64.028 53.336,64.015 U1.19
Key3: C9.2 R18.1 SW4.2 U1.18 | length 69.9
  Top Layer w0.254: v1(40.767,58.166) 44.577,61.976 v1(50.8,61.976)
  Bottom Layer w0.254: SW4.2@36.025,15.041 36.098,15.114 36.098,17.95 36.098,18.15 C9.2@36.498,18.55 ; C9.2@36.098,18.796 36.491,19.189 36.842,19.189 38.249,20.596 R18.1 ; v1(40.767,58.166) 40.767,24.803 38.354,22.39 R18.1 ; SW4.2@43.975,15.041 43.975,18.382 41.888,20.469 38.481,20.469 R18.1 ; v1(50.8,61.976) 52.169,61.976 52.823,62.63 52.823,63.237 52.836,63.25 U1.18
MISO: J2.2 U1.27 | length 34.5
  Top Layer w0.254: v1(35.179,43.561) 38.85,43.561 48.578,53.288 48.959,53.288 53.777,58.106 53.777,59.197 53.975,59.395 v1(53.975,60.579)
  Bottom Layer w0.254: J2.2 v1(35.179,43.561) 35.243,43.497 35.243,42.1 v2(35.306,42.037) ; v1(53.975,60.579) 54.587,61.191 55.135,61.191 55.267,61.059 U1.27
MOSI: J2.4 U1.28 | length 38.9
  Top Layer w0.254: v1@32.526,43.575 32.625,43.575 33.269,42.931 38.867,42.931 48.767,52.831 49.148,52.831 54.234,57.917 54.234,58.879 54.432,59.078 54.432,60.04 54.874,60.482 v1(54.874,60.561)
  Bottom Layer w0.152: v1(54.874,60.561) 54.89,60.545 56.872,60.545 U1.28@56.896,60.569
  Bottom Layer w0.254: v2(32.639,42.037) 32.576,42.1 32.576,43.624 v1(32.512,43.688) 32.512,45.594 J2.4 ; v1(54.874,60.561) 54.883,60.569 U1.28@56.896,60.569
NetC11_1: C11.1 C13.1 | length 11.7
  Bottom Layer w0.254: C11.1 37.726,56.762 36.964,56.762 36.195,57.531 36.195,65.278 36.964,66.047 37.841,66.047 C13.1
NetD1_1: D1.1 R2.1 | length 2.5
  Bottom Layer w0.254: D1.1@18.53,63.729 20.665,63.729 R2.1@20.955,64.019
NetD2_1: D2.1 R5.1 | length 2.4
  Bottom Layer w0.254: R5.1 16.371,65.427 16.448,65.504
NetD3_1: D3.1 R30.1 | length 2.2
  Bottom Layer w0.254: R30.1 67.377,48.668 69.46,48.668 D3.1
NetLCD1_4: LCD1.4 R22.1 | length 45.5
  Top Layer w0.254: v1(25.4,81.407) 25.4,80.518 26.284,79.634 61.6,79.634 62.438,80.472 62.438,81.107 v1(62.484,81.153)
  Bottom Layer w0.254: LCD1.4 25.273,81.628 25.4,81.501 v1(25.4,81.407) ; R22.1@62.436,78.089 62.484,78.137 v1(62.484,81.153)
  Bottom Layer w0.635: R22.1 R22.1@62.436,78.089
NetLCD1_5: LCD1.5 R21.1 | length 40.3
  Top Layer w0.254: v1(27.686,81.407) 27.686,80.54 27.835,80.391 59.69,80.391 v1(60.452,81.153)
  Bottom Layer w0.254: v1(27.686,81.407) 27.75,81.471 27.75,84.138 LCD1.5 LCD1.5@27.94,84.328 ; R21.1 60.452,77.913 v1(60.452,81.153)
NetLCD1_6: LCD1.6 R20.1 | length 34.3
  Top Layer w0.254: v1(30.353,81.407) 57.971,81.407 58.23,81.148 v1(58.293,81.148)
  Bottom Layer w0.254: v1(30.353,81.407) 30.353,84.074 30.226,84.201 LCD1.6 ; v1(58.293,81.148) 58.293,78.016 R20.1
NetLCD1_7: LCD1.7 R17.1 | length 6.4
  Bottom Layer w0.254: LCD1.7 33.02,84.074 33.02,83.566 33.147,83.439 R17.1
NetLCD1_8: LCD1.8 R16.1 | length 6.5
  Bottom Layer w0.254: LCD1.8 35.56,84.074 35.433,83.947 35.433,77.989 R16.1
NetLCD1_9: LCD1.9 R15.1 | length 6.4
  Bottom Layer w0.254: LCD1.9 37.973,77.989 R15.1
NetLCD1_10: LCD1.10 R14.1 | length 6.5
  Bottom Layer w0.254: LCD1.10 40.513,82.55 40.767,82.296 40.767,77.989 R14.1
NetLCD1_11: LCD1.11 R13.1 | length 6.5
  Bottom Layer w0.254: LCD1.11 42.926,84.074 42.926,78.116 R13.1
NetLCD1_12: LCD1.12 R12.1 | length 6.4
  Bottom Layer w0.254: LCD1.12 45.593,77.989 R12.1
NetLCD1_13: LCD1.13 R11.1 | length 6.4
  Bottom Layer w0.254: LCD1.13 48.133,77.989 R11.1
NetLCD1_14: LCD1.14 R10.1 | length 6.4
  Bottom Layer w0.254: LCD1.14 50.673,77.989 R10.1
NetLCD1_15: LCD1.15 R9.1 | length 6.5
  Bottom Layer w0.254: LCD1.15 53.086,84.074 53.086,78.116 R9.1
NetLCD1_17: LCD1.17 R8.1 | length 7.4
  Bottom Layer w0.254: R8.1 55.753,80.772 58.039,83.058 58.039,83.947 LCD1.17
OSCIN: C11.2 R24.2 U1.5 Y1.2 | length 13.9
  Bottom Layer w0.254: C11.2 37.846,60.441 37.915,60.51 37.984,60.441 R24.2 40.524,60.452 44.427,60.452 46.32,58.559 U1.5
OSCOUT: C13.2 R24.1 U1.6 Y1.1 | length 14.8
  Bottom Layer w0.254: C13.2 Y1.1 37.984,62.241 39.999,62.241 40.132,62.108 40.132,62.103 40.27,62.241 R24.1 40.629,62.241 40.767,62.103 40.905,62.241 43.295,62.241 46.477,59.059 U1.6
PA0: R10.2 U1.10 | length 22
  Top Layer w0.254: v1(46.736,68.453) 46.736,74.168 47.498,74.93 49.911,74.93 v1(50.8,74.041)
  Bottom Layer w0.254: v1(46.736,68.453) 46.736,68.359 46.355,67.978 46.355,61.988 47.284,61.059 U1.10 ; v1(50.8,74.041) R10.2
PA1: R11.2 U1.11 | length 16.4
  Top Layer w0.254: v1@48.26,68.713 48.26,73.279 48.261,73.28 v1(48.261,74.04)
  Bottom Layer w0.254: v1@48.128,68.712 48.129,68.711 48.129,68.195 47.066,67.132 47.066,62.154 47.648,61.572 48.893,61.572 U1.11 ; v1(48.261,74.04) v1(48.261,74.04) R11.2 R11.2
  other v1: 48.128,68.453
PA2: R12.2 U1.12 | length 19.7
  Top Layer w0.254: v1@45.339,68.199 v1(45.339,68.453) 45.339,73.693 45.56,73.914 v1@45.626,73.914
  Bottom Layer w0.254: v1(45.339,68.453) 45.376,68.49 45.376,68.871 45.847,69.342 48.389,69.342 49.53,68.201 49.53,62.683 U1.12 ; v1@45.593,73.914 45.593,75.935 R12.2
  other v1: 45.593,74.041
PA3: R13.2 U1.13 | length 21.5
  Top Layer w0.254: v1@42.926,68.326 42.926,73.66 v1@43.053,73.787
  Bottom Layer w0.254: v1@42.926,68.326 42.926,68.961 43.764,69.799 48.579,69.799 50.336,68.042 U1.13 ; v1@43.053,73.787 43.053,75.935 R13.2
  other v1: 42.926,68.453 43.053,74.041
PA4: R14.2 U1.14 | length 24.8
  Top Layer w0.254: v1@40.64,68.199 v1@40.64,73.914
  Bottom Layer w0.254: v1@40.64,68.199 40.64,68.547 41.021,68.927 41.021,69.215 42.062,70.256 48.768,70.256 50.836,68.188 U1.14 ; v1@40.64,73.914 R14.2
  other v1: 40.64,68.453 40.64,74.041
PA5: R15.2 U1.15 | length 28.1
  Top Layer w0.254: v1(38.1,68.453) 38.1,73.533 v1@38.354,73.787
  Bottom Layer w0.254: v1(38.1,68.453) 38.1,69.088 39.726,70.714 49.174,70.714 51.306,68.582 51.306,63.5 51.317,63.489 U1.15 ; v1(38.1,73.914) R15.2
PA6: R16.2 U1.16 | length 32.3
  Top Layer w0.254: v1@35.56,68.326 v1@35.56,73.787
  Bottom Layer w0.254: v1@35.56,68.326 35.56,69.596 37.135,71.171 49.606,71.171 51.806,68.971 51.806,63.687 51.866,63.627 51.849,63.627 51.836,63.614 U1.16 ; v1@35.56,73.787 R16.2
  other v1: 35.56,68.453 35.56,74.041
PA7: R17.2 U1.17 | length 29.6
  Bottom Layer w0.254: R17.2 33.147,72.898 34.163,71.882 49.657,71.882 52.336,69.203 U1.17
PC13: R5.2 U1.2 | length 40
  Top Layer w0.254: v1(14.097,59.436) 18.542,59.436 20.838,57.14 v1(44.069,57.14)
  Bottom Layer w0.254: v1(14.097,59.436) R5.2 ; v1(44.069,57.14) 44.135,57.074 44.376,57.074 44.391,57.059 U1.2
PC14: C14.2 U1.3 Y2.1 | length 24.8
  Bottom Layer w0.254: Y2.1@45.085,42.164 45.085,47.311 C14.2 46.426,49.84 42.307,53.959 42.307,57.588 42.885,58.166 44.946,58.166 45.553,57.559 U1.3
PC15: C12.2 U1.4 Y2.2 | length 25.7
  Bottom Layer w0.254: Y2.2@43.561,42.164 43.561,42.291 43.18,42.672 43.053,42.672 42.418,43.307 42.418,47.752 42.97,48.304 43.411,48.304 C12.2 43.759,50.761 41.85,52.67 41.85,58.207 42.34,58.696 45.063,58.696 45.7,58.059 U1.4
PREM_CS: J2.3 U1.25 | length 36.1
  Top Layer w0.254: v1(32.667,53.666) 32.693,53.666 33.251,54.224 48.601,54.224 51.816,57.439 v1(51.816,60.579)
  Bottom Layer w0.254: J2.3 32.667,51.843 v1(32.667,53.666) ; v1@32.639,53.666 32.639,53.721 v2@32.639,57.912 ; v1(51.816,60.579) 53.342,62.105 55.601,62.105 55.647,62.059 U1.25
  other v2: 32.639,58.039
Relay: J3.9 U1.38 | length 64.5
  Top Layer w0.254: v2(7.366,58.039) 7.366,51.815 7.696,51.486 24.433,51.486 27.628,54.681 47.95,54.681 v1(50.8,57.531)
  Bottom Layer w0.254: J3.9 v2(7.366,58.039) ; v1(50.8,57.531) 51.876,56.455 54.856,56.455 55.323,55.988 55.323,55.142 U1.38
RESET: C1.2 R1.1 SW1.2 U1.7 | length 56.8
  Top Layer w0.254: v1(24.384,68.199) 25.273,67.31 38.862,67.31 v1(42.926,63.246)
  Bottom Layer w0.254: SW1.2@6.513,62.319 6.513,70.269 8.888,72.644 13.468,72.644 R1.1 C1.2 18.737,69.596 22.987,69.596 v1(24.384,68.199) ; v1(42.926,63.246) 43.474,62.698 43.485,62.698 46.654,59.529 48.177,59.529 48.194,59.546 48.893,59.546 U1.7
RET: R22.2 U1.43 | length 41.5
  Top Layer w0.254: v1(54.864,46.863) 62.484,54.483 v1(62.484,64.516)
  Bottom Layer w0.254: U1.43 52.836,48.891 v1(54.864,46.863) ; R22.2 62.484,76.041 v1(62.484,64.516)
RS485_RE: J3.3 U1.29 | length 52.2
  Top Layer w0.254: v1(14.986,56.896) 16.891,58.801 18.53,58.801 20.821,56.51 46.731,56.51 v1(50.8,60.579)
  Bottom Layer w0.254: J3.3 v2@14.986,57.912 ; v1(50.8,60.579) 51.448,59.931 55.683,59.931 55.812,60.059 U1.29@57.392,60.059
  other v2: 14.986,58.039
RS485_RX: J3.7 U1.31 | length 57.6
  Top Layer w0.254: v1@9.906,53.848 9.906,53.149 11.112,51.943 17.272,51.943 20.925,55.596 47.832,55.596 50.783,58.547 v1(50.8,58.547)
  Bottom Layer w0.254: J3.7 v1@9.906,53.848 ; v1(9.906,53.975) 9.942,54.011 9.942,57.931 v2(9.978,57.967) ; v1(50.8,58.547) 50.884,58.547 51.353,59.016 56.062,59.016 56.105,59.059 U1.31
RS485_TX: J3.1 U1.30 | length 48.2
  Top Layer w0.254: v1(17.519,56.774) 17.567,56.774 18.288,56.053 47.29,56.053 v1(50.8,59.563)
  Bottom Layer w0.254: v2@17.399,58.293 17.399,58.199 17.519,58.079 17.459,58.019 17.459,56.834 v1(17.519,56.774) 17.519,51.822 J3.1 ; v1(50.8,59.563) 50.866,59.497 51.236,59.497 51.259,59.473 55.873,59.473 55.958,59.559 U1.30
  other v2: 17.399,58.039
SCK: J2.1 U1.26 | length 35.4
  Top Layer w0.254: v1(35.306,53.594) 35.306,52.324 35.941,51.689 46.332,51.689 48.41,53.767 48.791,53.767 52.832,57.808 v1(52.832,60.579)
  Bottom Layer w0.254: J2.1 35.306,51.942 v1(35.306,53.594) v2@35.306,57.912 ; v1(52.832,60.579) 53.901,61.648 55.412,61.648 55.458,61.602 55.506,61.602 55.549,61.559 U1.26
  other v2: 35.306,58.039
SCL: R28.1 U1.45 U2.6 | length 26.9
  Top Layer w0.254: v1(49.5,51.41) 49.438,51.472 49.322,51.472 49.434,51.36 49.434,51.25 49.361,51.176 49.361,50.552 53.939,45.974 58.166,45.974 58.503,46.311 v1(58.503,47.1)
  Bottom Layer w0.254: v1(49.5,51.41) 49.5,51.503 49.655,51.657 49.655,51.71 51.823,53.879 51.823,55.116 U1.45 ; R28.1 58.553,47.175 62.103,43.625 62.103,41.821 61.43,41.148 U2.6
SDA: R25.1 U1.46 U2.5 | length 32.2
  Top Layer w0.254: v1(48.813,50.209) 53.683,45.339 59.944,45.339 60.579,45.974 v1(60.579,47.004)
  Bottom Layer w0.254: v1(48.813,50.209) 48.813,50.274 48.364,50.723 48.364,51.165 51.323,54.123 51.323,55.116 U1.46 ; U2.5 61.976,39.878 63.515,41.417 63.515,44.142 60.874,46.784 60.874,46.788 60.583,47.079 R25.1
SWDCLK: J1.4 U1.37 | length 47.7
  Bottom Layer w0.254: U1.37 55.836,54.127 56.217,53.746 68.103,53.746 90.099,31.75 J1.4
SWDIO: J1.3 U1.34 | length 45.8
  Bottom Layer w0.254: U1.34 57.279,57.572 57.978,57.572 57.995,57.589 58.142,57.589 58.35,57.797 68.568,57.797 92.075,34.29 J1.3
UART3_RX: J4.2 U1.22 | length 48.6
  Top Layer w0.254: v1(56.515,66.675) 73.354,66.675 90.17,49.859 90.17,49.684 90.451,49.403 J4.2
  Bottom Layer w0.254: U1.22 54.836,66.266 55.245,66.675 v1(56.515,66.675)
UART3_TX: J4.1 U1.21 | length 49.1
  Top Layer w0.254: v1(56.515,67.691) 77.47,67.691 J4.1
  Bottom Layer w0.254: U1.21 54.336,66.909 55.118,67.691 v1(56.515,67.691)
V0: LCD1.18 R23.2 | length 57.2
  Top Layer w0.635: v1(12.954,86.995) 14.224,86.995 18.796,91.567 57.15,91.567 60.833,87.884 LCD1.18
  Bottom Layer w0.635: R23.2@11.277,88.35 11.34,88.35 12.695,86.995 v1(12.954,86.995)
VCC3V3: C2.2 C5.2 C6.2 C7.2 C8.2 C15.2 D1.2 D2.2 D3.2 J1.1 J2.5 J2.7 J3.5 J4.4 R1.2 R6.2 R7.2 R18.2 R19.2 R25.2 R28.2 U1.9 U1.24 U1.36 U1.48 U2.8 | length 438
  Top Layer w0.254: v1(62.842,48.781) 63.881,49.82 63.881,53.568 64.008,53.695 v1(64.008,54.376) 64.008,54.469 63.87,54.607 v1(63.87,59.182)
  Top Layer w0.635: v2(12.446,58.039) 10.033,60.452 6.604,60.452 2.159,56.007 2.159,17.018 11.43,7.747 v1(18.161,7.747)
  Bottom Layer w0.254: J3.5@12.319,52.197 12.446,52.07 J3.5 ; v2@12.446,57.785 13.589,57.785 16.51,60.706 ; C2.2 14.147,69.618 R1.2@16.195,67.57 ; R1.2 18.654,65.658 ; J2.7 29.083,51.816 ; 29.084,51.815 J2.5 30.099,58.547 27.94,60.706 16.51,60.706 ; C7.2 46.693,50.6 46.693,51.927 49.311,54.546 50.323,54.546 50.336,54.559 U1.48 50.323,55.142 50.323,56.228 50.016,56.535 50.016,60.295 49.765,60.546 48.919,60.546 U1.9 48.654,60.559 48.641,60.572 48.641,60.579 47.117,60.579 41.772,65.924 C8.2 39.016,67.548 20.544,67.548 18.654,65.658 ; C5.2 55.735,69.476 56.508,69.476 57.658,68.326 57.658,65.311 56.825,64.478 ; C15.2 56.381,43.688 U2.8@59.651,43.688 ; U1.36@56.642,56.546 56.655,56.559 U1.36 C6.2@63.66,56.559 ; 56.863,64.516 56.825,64.478 ; U2.8 59.765,43.688 59.651,43.802 59.651,43.907 57.071,46.486 57.071,48.456 57.391,48.775 R28.2 58.551,48.727 60.531,48.727 R25.2 60.654,48.754 60.817,48.754 60.879,48.693 62.753,48.693 v1@62.867,48.806 ; C6.2 63.87,56.02 64.421,55.469 64.421,54.262 64.215,54.262 64.101,54.376 v1(64.008,54.376) ; v1(63.87,59.182) 59.563,63.489 U1.24 56.825,64.478 ; 16.51,60.706 D2.2 16.606,63.487 18.038,64.919 18.074,64.919 18.283,65.129 18.283,65.164 18.561,65.442 18.561,65.565 18.654,65.658
  Bottom Layer w0.635: J3.5@12.319,52.197 12.446,52.324 v2@12.446,57.785 ; R19.2 19.05,18.669 19.05,8.636 v1(18.161,7.747) 36.957,7.747 ; 38.354,18.15 38.481,18.023 38.481,9.271 36.957,7.747 ; R7.2@61.128,18.621 61.341,18.409 61.341,9.525 59.563,7.747 ; v1(62.842,48.781) 62.842,49.808 63.834,50.8 69.348,50.8 71.02,49.128 71.02,48.602 ; D3.2 70.448,47.08 71.011,47.643 ; 71.011,48.593 71.011,47.643 ; R6.2@79.895,18.367 79.895,9.918 77.724,7.747 ; J1.1 95.758,39.37 ; J4.4 95.142,44.323 95.758,43.707 95.758,39.37 ; 36.957,7.747 59.563,7.747 ; 59.563,7.747 77.724,7.747 ; 71.011,47.643 71.011,33.51 75.438,29.083 95.758,29.083 ; 77.724,7.747 88.392,7.747 95.758,15.113 95.758,29.083 ; 95.758,29.083 95.758,39.37
VCC5V: J3.11 LCD1.2 LCD1.19 R23.3 | length 108.6
  Bottom Layer w0.254: LCD1.19@63.246,84.328 LCD1.19
  Bottom Layer w0.635: J3.11 v3@4.826,57.649 ; v3(4.962,57.649) 4.962,88.684 6.722,90.445 9.223,93.494 9.455,93.726 11.947,93.726 12.319,93.354 12.319,91.629 R23.3 12.423,91.467 13.435,91.467 16.891,88.011 20.955,88.011 ; LCD1.2 20.193,87.249 20.763,87.819 20.955,88.011 ; LCD1.19@63.246,84.328 63.246,87.639 62.874,88.011 20.955,88.011
VEE: LCD1.3 R23.1 | length 32.6
  Bottom Layer w0.254: LCD1.3 22.86,84.074 LCD1.3@22.86,83.439
  Bottom Layer w0.635: R23.1@10.484,91.294 10.09,91.687 10.008,91.605 10.008,91.168 8.001,89.161 8.001,80.391 9.271,79.121 21.844,79.121 22.606,79.883 22.606,83.185 LCD1.3@22.86,83.439
WarnOut: J3.2 | length 3.7
  Bottom Layer w0.635: J3.2 17.526,42.131 v2(17.62,42.037)
ZX0: J3.4 | length 3.7
  Bottom Layer w0.254: J3.4 14.986,42.258 15.113,42.131 v2(15.113,42.037)
ZX1: J3.6 | length 3.7
  Bottom Layer w0.254: J3.6 12.446,42.258 12.573,42.131 v2(12.573,42.037)
ZX2: J3.8 | length 3.7
  Bottom Layer w0.254: J3.8 9.906,42.258 10.033,42.131 v2(10.033,42.037)
pads on no net: J2.13 J2.14 J2.15 J2.16 J2.17 J2.18 J2.19 J2.20 J2.21 J2.22 J2.23 J2.24 J3.13 J3.14 J3.15 J3.16 J3.17 J3.18 J3.19 J3.20 J3.21 J3.22 J3.23 J3.24 U1.1

## Polygon pours and split planes (outlines as drawn)
GND on Top Layer "GND" (solid, remove dead copper, pour order 1): 0,97.536 0.036,97.5 24.398,97.5 26.394,95.504 71.12,95.504 73.152,97.536 97.545,97.536 97.546,97.535 97.546,-0.022 97.549,-0.025 73.177,-0.025 73.152,0 73.143,0 71.143,2 26.379,2 26.379,1.995 24.384,0 0,0
GND on Bottom Layer "GND" (solid, remove dead copper, pour order 0): 0,97.536 0.036,97.5 24.398,97.5 26.394,95.504 71.12,95.504 73.152,97.536 97.545,97.536 97.546,97.535 97.546,-0.022 97.549,-0.025 73.177,-0.025 73.152,0 73.143,0 71.143,2 26.379,2 26.379,1.995 24.384,0 0,0

## Keep-outs
Keep-Out Layer:
  lines w0.254: 68.83,95.5 68.834,95.504 ; 97.464,0 73.152,0 71.152,2 71.134,2 26.384,2 26.375,2 24.375,0 0,0 0,97.5 24.375,97.5 24.42,97.5 26.42,95.5 71.116,95.5 73.116,97.5 97.5,97.5 97.5,0.036

## Silkscreen, mask and mechanical layers (free items; w line width, h text height)
Bottom Overlay:
  text "Bi-directional 3-Phase Energy Measurement Device /  / LAB209B3 - 2026 Designed by TuanLong" at 96.051,93.98 h1 r90
  text "GND" at 18.25,93.297 h2 r90
  text "+5V" at 20.79,93.297 h2 r90
  text "VEE" at 23.33,93.297 h2 r90
  text "RET" at 25.87,93.297 h2 r90
  text "CS2" at 28.156,93.297 h2 r90
  text "CS1" at 30.569,93.297 h2 r90
  text "DB7" at 33.363,93.297 h2 r90
  text "DB6" at 35.903,93.297 h2 r90
  text "DB5" at 38.57,93.297 h2 r90
  text "DB4" at 40.983,93.297 h2 r90
  text "DB3" at 43.777,93.297 h2 r90
  text "DB2" at 46.317,93.297 h2 r90
  text "DB1" at 48.857,93.297 h2 r90
  text "DB0" at 51.27,93.297 h2 r90
  text "E" at 54.064,93.297 h2 r90
  text "R/W" at 56.604,93.297 h2 r90
  text "D/I" at 59.271,93.297 h2 r90
  text "V0" at 61.684,93.297 h2 r90
  text "+5V" at 64.478,93.297 h2 r90
  text "GND" at 67.018,93.297 h2 r90
  text "Relay" at 7.545,56.222 h1 r90
  text "IRQ0" at 22.581,56.222 h1 r90
  text "IRQ1" at 25.375,56.126 h1 r90
  text "SCK" at 35.559,56.048 h1 r90
  text "+3V3" at 12.699,56 h1 r90
  text "PM0" at 28.066,55.992 h1 r90
  text "PM1" at 30.483,55.897 h1 r90
  text "+5V" at 5.075,55.556 h1 r90
  text "CS" at 32.892,55.422 h1 r90
  text "RX" at 10.159,55.158 h1 r90
  text "TX" at 17.779,55.157 h1 r90
  text "RE" at 15.239,55.085 h1 r90
  text "TX" at 91.389,51.49 h2
  text "RX" at 91.389,48.95 h2
  text "GND" at 91.389,46.139 h2
  text "+3V3" at 91.389,43.599 h2
  text "GND" at 5.148,41.242 h1 r90
  text "GND" at 7.688,41.242 h1 r90
  text "ZX2" at 10.233,41.242 h1 r90
  text "ZX1" at 12.773,41.242 h1 r90
  text "ZX0" at 15.49,41.242 h1 r90
  text "WarnOut" at 17.904,41.242 h1 r90
  text "CF1" at 22.859,41.242 h1 r90
  text "CF2" at 25.399,41.242 h1 r90
  text "CF3" at 27.939,41.242 h1 r90
  text "CF4" at 30.606,41.242 h1 r90
  text "MOSI" at 33.019,41.242 h1 r90
  text "MISO" at 35.559,41.242 h1 r90
  text "+3V3" at 91.135,38.9 h2
  text "GND" at 91.135,36.487 h2
  text "SWDIO" at 91.135,33.693 h2
  text "SCLK" at 91.135,31.153 h2
  text "SET" at 23.312,6.537 h3.5
  text "ESC" at 43.378,6.537 h3.5
  text "DWN" at 63.19,6.41 h3.5
  text "UP" at 83.51,6.41 h3.5